# Altium PCB M2male_M2female_miniDP.PcbDoc
Units mm, origin at the board's own origin, x right, y up, seen from the top; angles counter-clockwise.
Board outline 22 x 96.02 mm, 2 copper layers (Top Layer, Bottom Layer); 11 components, 31 nets, 183 pads, 169 vias.
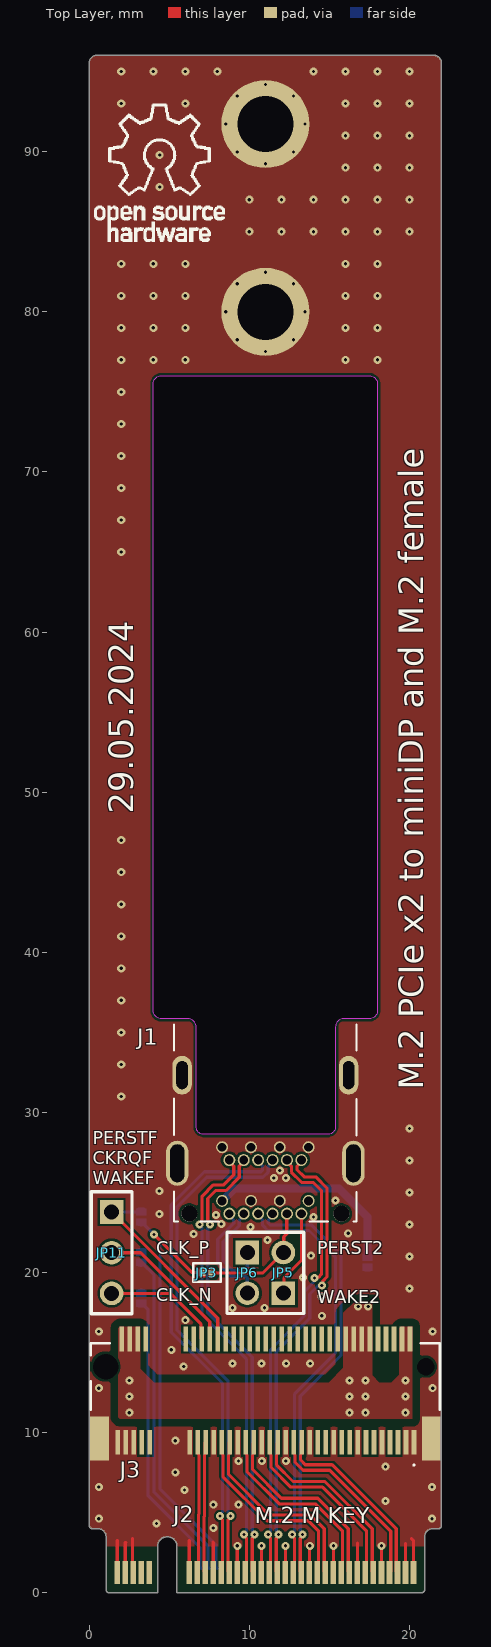
[diagram p0: Top Layer view]
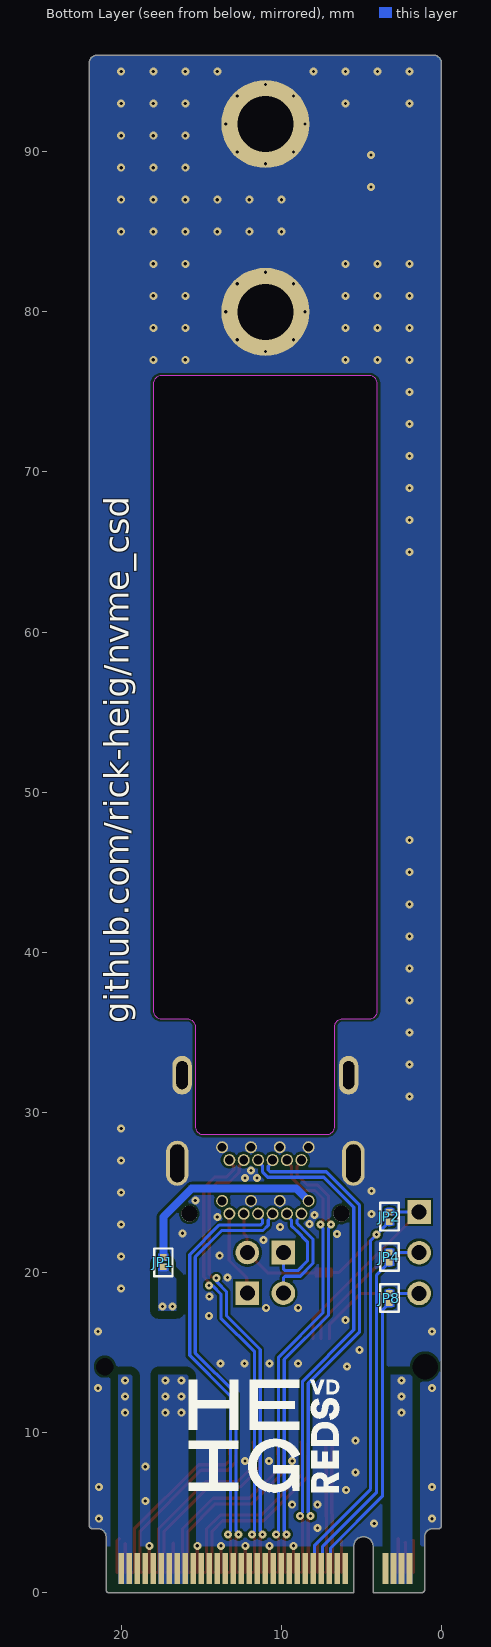
[diagram p1: Bottom Layer view, seen from below]
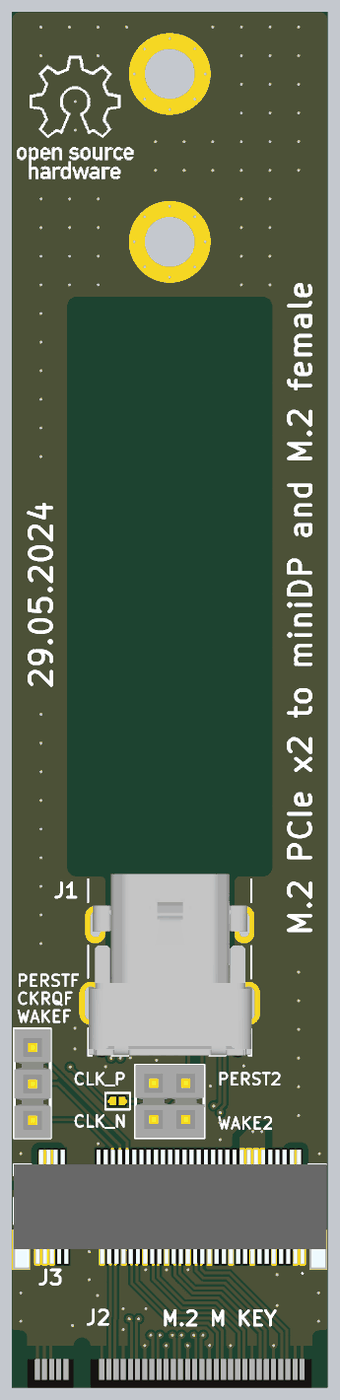
[diagram p2: 3D render of the assembled board from above, using the file's embedded part models]

## Layer stack, top to bottom
Top Solder: solder mask 0.0102, Solder Resist, Dk 3.5
Top Layer: signal copper 0.0356
Dielectric 1: dielectric 0.32, FR-4, Dk 4.8
Bottom Layer: signal copper 0.0356
Bottom Solder: solder mask 0.0102, Solder Resist, Dk 3.5

## Board outline
1.05,0.2 1.05,3.5 ccw(c0.55,3.5) 0.55,4 0.2,4 cw(c0.2,4.2) 0,4.2 0,95.525 cw(c0.5,95.525) 0.5,96.025 21.5,96.025 cw(c21.5,95.525) 22,95.525 22,4.2 cw(c21.8,4.2) 21.8,4 21.45,4 ccw(c21.45,3.5) 20.95,3.5 20.95,0.2 cw(c20.75,0.2) 20.75,0 5.475,0 5.475,2.9 ccw(c4.875,2.9) 4.875,3.5 ccw(c4.875,2.9) 4.275,2.9 4.275,0 1.25,0 cw(c1.25,0.2)
cut-out: 6.675,35.35 ccw(c6.175,35.35) 6.175,35.85 4.5,35.85 cw(c4.5,36.35) 4,36.35 4,75.5 cw(c4.5,75.5) 4.5,76 17.5,76 cw(c17.5,75.5) 18,75.5 18,36.35 cw(c17.5,36.35) 17.5,35.85 15.875,35.85 ccw(c15.875,35.35) 15.375,35.35 15.375,29.125 cw(c14.875,29.125) 14.875,28.625 7.175,28.625 cw(c7.175,29.125) 6.675,29.125

## Design rules (kind name [scope] priority, off if disabled: settings)
BoardOutlineClearance [All] p1: gap=0 ignorepadtopadclearanceinfootprint=FALSE
Clearance Clearance_J2 [All] p1: gap=0.15 ignorepadtopadclearanceinfootprint=FALSE except(0.149: Track-SMDPad SMDPad-SMDPad; 0.5: Poly-Poly)
Clearance [All] p2: gap=0.15 ignorepadtopadclearanceinfootprint=FALSE except(0.5: Poly-Poly)
Clearance Clearance_DIFF [InAnyDifferentialPair] p3: gap=0.15 ignorepadtopadclearanceinfootprint=FALSE
Clearance Clearance_TOP [InNamedPolygon('GND-TOP')] p4: gap=0.15 ignorepadtopadclearanceinfootprint=FALSE
Clearance Clearance_BOTTOM [InNamedPolygon('GND-TOP')] p5: gap=0.15 ignorepadtopadclearanceinfootprint=FALSE
ComponentClearance [All] p1: gap=0.254 collisioncheckmode=3 verticalgap=0.254 showdistances=FALSE donotcheckwithout3dbody=TRUE
DiffPairsRouting [All] p1: maxlimit=0.15 minlimit=0.15 mostfreqgap=0.15 toplayer_minwidth=0.2 toplayer_maxwidth=0.2 toplayer_prefwidth=0.2 bottomlayer_minwidth=0.2 bottomlayer_maxwidth=0.2 bottomlayer_prefwidth=0.2 impedanceprofiledriven=TRUE impedanceprofileid={8BE430F4-6E11-4254-9D0B-8478A02E9357} maxuncoupledlength=12.7
HoleSize [All] p1: absolutevalues=TRUE maxlimit=5 minlimit=0.025 maxpercent=80.000 minpercent=20.000
HoleToHoleClearance [All] p1: gap=0.15 allowstackedmicrovias=TRUE
Length [All] p1: maxlimit=2540 minlimit=0
MatchedLengths MatchLengths_xSignals_J2_J1 [All] p1: tolerance=0.05 checknetsindiffpair=TRUE checkdiffpairvsdiffpair=FALSE checkxsignals=FALSE checkothers=FALSE
MinimumSolderMaskSliver [All] p1: minsoldermaskwidth=0.075
PlaneConnect [All] p1: planeconnectstyle=Direct reliefexpansion=0.508 reliefentries=4 reliefconductorwidth=0.254 reliefairgap=0.254
PolygonConnect PolygonConnect_14 [All vs IsNamedPolygon('3.3V-004')] p1: connectstyle=Direct reliefconductorwidth=0.254 reliefentries=4 polygonreliefangle="90 Angle" airgapwidth=0.254
PolygonConnect PolygonConnect_13 [All vs IsNamedPolygon('GND-BOTTOM')] p2: connectstyle=Direct reliefconductorwidth=0.254 reliefentries=4 polygonreliefangle="90 Angle" airgapwidth=0.254
PolygonConnect PolygonConnect_12 [All vs IsNamedPolygon('GND-TOP')] p3: connectstyle=Direct reliefconductorwidth=0.254 reliefentries=4 polygonreliefangle="90 Angle" airgapwidth=0.254
PolygonConnect PolygonConnect_11 [All vs IsNamedPolygon('3.3V-001')] p4: connectstyle=Direct reliefconductorwidth=0.254 reliefentries=4 polygonreliefangle="90 Angle" airgapwidth=0.254
PolygonConnect PolygonConnect_10 [All vs IsNamedPolygon('3.3V-001')] p5: connectstyle=Direct reliefconductorwidth=0.254 reliefentries=4 polygonreliefangle="90 Angle" airgapwidth=0.254
PolygonConnect PolygonConnect_9 [All vs IsNamedPolygon('3.3V-003')] p6: connectstyle=Direct reliefconductorwidth=0.254 reliefentries=4 polygonreliefangle="90 Angle" airgapwidth=0.254
PolygonConnect PolygonConnect_8 [All vs IsNamedPolygon('3.3V-002')] p7: connectstyle=Direct reliefconductorwidth=0.254 reliefentries=4 polygonreliefangle="90 Angle" airgapwidth=0.254
PolygonConnect PolygonConnect_7 [All vs IsNamedPolygon('3.3V-003')] p8: connectstyle=Direct reliefconductorwidth=0.254 reliefentries=4 polygonreliefangle="90 Angle" airgapwidth=0.254
PolygonConnect PolygonConnect_6 [All vs IsNamedPolygon('GND-TOP')] p9: connectstyle=Direct reliefconductorwidth=0.254 reliefentries=4 polygonreliefangle="90 Angle" airgapwidth=0.254
PolygonConnect PolygonConnect_5 [All vs IsNamedPolygon('Top Layer-GND')] p10: connectstyle=Direct reliefconductorwidth=0.254 reliefentries=4 polygonreliefangle="90 Angle" airgapwidth=0.254
PolygonConnect PolygonConnect_4 [All vs IsNamedPolygon('GND-TOP')] p11: connectstyle=Direct reliefconductorwidth=0.254 reliefentries=4 polygonreliefangle="90 Angle" airgapwidth=0.254
PolygonConnect PolygonConnect_3 [All vs IsNamedPolygon('GND-TOP')] p12: connectstyle=Direct reliefconductorwidth=0.254 reliefentries=4 polygonreliefangle="90 Angle" airgapwidth=0.254
PolygonConnect PolygonConnect_2 [All vs IsNamedPolygon('GND-TOP')] p13: connectstyle=Direct reliefconductorwidth=0.254 reliefentries=4 polygonreliefangle="90 Angle" airgapwidth=0.254
PolygonConnect PolygonConnect_1 [All vs IsNamedPolygon('GND-TOP')] p14: connectstyle=Direct reliefconductorwidth=0.254 reliefentries=4 polygonreliefangle="90 Angle" airgapwidth=0.254
PolygonConnect [All] p15: connectstyle=Relief reliefconductorwidth=0.254 reliefentries=4 polygonreliefangle="90 Angle" airgapwidth=0.254
RoutingVias [All] p1: holewidth=0.2 width=0.5 viastyle="Through Hole" minholewidth=0.15 minwidth=0.4 maxholewidth=0.4 maxwidth=0.8
SilkToSolderMaskClearance [IsPad] p1: minsilkscreentomaskgap=0.2 clearancetoexposedcopper=TRUE
SolderMaskExpansion [All] p1: expansion=0.102 istentingtop=FALSE
SupplyNets "Schematic Supply Nets_1" [InNet('3.3V')] p1: voltage=0.000
SupplyNets "Schematic Supply Nets" [InNet('GND')] p2: voltage=0.000
Width [All] p1: maxlimit=0.5 minlimit=0.1 preferedwidth=0.2
23 further rules are at their usual default settings.

## Classes and differential pairs
differential pair PET3: +PET3_P -PET3_N
differential pair PET2: +PET2_P -PET2_N
differential pair PET1: +PET1_P -PET1_N
differential pair PET0: +PET0_P -PET0_N
differential pair PER3: +PER3_P -PER3_N
differential pair PER2: +PER2_P -PER2_N
differential pair PER1: +PER1_P -PER1_N
differential pair PER0: +PER0_P -PER0_N
differential pair CLK: +CLK_P -CLK_N

## Components (designator, comment, footprint, x,y, rotation, side; value= is the part's Value field where it differs from the comment)
J1 "2129320-3" CONN_2129320-3 11,32.325 r180 top locked
J2 "NGFF_M_V2" M.2-M-KEY-2280-V2 11,0 r0 top locked value=NGFF_M
J3 "APCI0164-P001A" APCI0164P001A 11.026,12.625 r180 top locked
JP1 "JUMPER_A_SOUDER" "JUMPER_A_SOUDER (0201)" 17.375,20.65 r270 bottom value=0201
JP2 "JUMPER_A_SOUDER" "JUMPER_A_SOUDER (0201)" 3.25,23.475 r90 bottom value=0201
JP3 "JUMPER_A_SOUDER" "JUMPER_A_SOUDER (0201)" 7.35,20 r0 top value=0201
JP4 "JUMPER_A_SOUDER" "JUMPER_A_SOUDER (0201)" 3.25,20.95 r90 bottom value=0201
JP5 "HEADER_2" BLKCON.100/VH/TM1SQ/W.100/2 12.125,19.98 r90 top
JP6 "HEADER_2" BLKCON.100/VH/TM1SQ/W.100/2 9.875,19.98 r270 top
JP8 "JUMPER_A_SOUDER" "JUMPER_A_SOUDER (0201)" 3.25,18.4 r90 bottom value=0201
JP11 "HEADER_3" BLKCON.100/VH/TM1SQ/W.100/3 1.397,21.24 r270 top

## Footprints (in the part's own frame and the unit in brackets; to place one, negate y for a bottom-side part, rotate by r counter-clockwise, add the part's x,y. Pads: shape width x height; smd on the part's side, far side on the other; paste and mask are expansions set on the pad)
APCI0164P001A [mm]
  rect 0.3x1.55 smd: 1(-9.25,3.225) 2(-9,-3.225) 3(-8.75,3.225) 4(-8.5,-3.225) 5(-8.25,3.225) 6(-8,-3.225) 7(-7.75,3.225) 8(-7.5,-3.225) 9(-7.25,3.225) 10(-7,-3.225) 11(-6.75,3.225) 12(-6.5,-3.225) 13(-6.25,3.225) 14(-6,-3.225) 15(-5.75,3.225) 16(-5.5,-3.225) 17(-5.25,3.225) 18(-5,-3.225) 19(-4.75,3.225) 20(-4.5,-3.225) 21(-4.25,3.225) 22(-4,-3.225) 23(-3.75,3.225) 24(-3.5,-3.225) 25(-3.25,3.225) 26(-3,-3.225) 27(-2.75,3.225) 28(-2.5,-3.225) 29(-2.25,3.225) 30(-2,-3.225) 31(-1.75,3.225) 32(-1.5,-3.225) 33(-1.25,3.225) 34(-1,-3.225) 35(-0.75,3.225) 36(-0.5,-3.225) 37(-0.25,3.225) 38(0,-3.225) 39(0.25,3.225) 40(0.5,-3.225) 41(0.75,3.225) 42(1,-3.225) 43(1.25,3.225) 44(1.5,-3.225) 45(1.75,3.225) 46(2,-3.225) 47(2.25,3.225) 48(2.5,-3.225) 49(2.75,3.225) 50(3,-3.225) 51(3.25,3.225) 52(3.5,-3.225) 53(3.75,3.225) 54(4,-3.225) 55(4.25,3.225) 56(4.5,-3.225) 57(4.75,3.225) 58(5,-3.225) 67(7.25,3.225) 68(7.5,-3.225) 69(7.75,3.225) 70(8,-3.225) 71(8.25,3.225) 72(8.5,-3.225) 73(8.75,3.225) 74(9,-3.225) 75(9.25,3.225)
  round 0.55 hole 1.1 unplated: MH1(-10,-1.5)
  round 0.8 hole 1.6 unplated: MH2(10,-1.5)
  rect 1.2x2.75 smd mask+0.024: MP1(-10.35,3) MP2(10.402,3)
  silkscreen extent -10.87,-2.95 10.92,4.7, body extent -10.92,-3.97 10.92,4.26, height 8.8
BLKCON.100/VH/TM1SQ/W.100/2 [mil] "Barette 2.54 - 2P"
  rect 58x58 hole 37: 1(-50,0)
  round 58 hole 37: 2(50,0)
  silkscreen extent -100,-50 100,50, body extent -100,-50 100,50, height 330
BLKCON.100/VH/TM1SQ/W.100/3 [mil] "Barette 2.54 - 3P"
  rect 58x58 hole 37: 1(-100,0)
  round 58 hole 37: 2(0,0) 3(100,0)
  silkscreen extent -150,-50 150,50, body extent -148,-49 152,51, height 330
CONN_2129320-3 [mm]
  round 0.75 hole 0.55: 1G(-2.7,4.5) 2(-2.7,7.85) 3(-2.25,5.3) 4(-2.25,8.65) 5(-1.35,5.3) 6(-1.35,8.65) 7G(-0.9,4.5) 8G(-0.9,7.85) 9(-0.45,5.3) 10(-0.45,8.65) 11(0.45,5.3) 12(0.45,8.65) 13G(0.9,4.5) 14G(0.9,7.85) 15(1.35,5.3) 16(1.35,8.65) 17(2.25,5.3) 18(2.25,8.65) 19G(2.7,4.5) 20_POWER(2.7,7.85)
  oval 1.408x2.816 hole 0.9 slot 2.35 at 90 deg: 21(-5.5,5.5) 22(5.5,5.5)
  oval 1.208x2.416 hole 0.7 slot 1.74 at 90 deg: 23(5.2,0) 24(-5.2,0)
  round 1 hole 1 unplated: ""(-4.75,8.65) ""(4.75,8.65)
  silkscreen extent -5.7,-3.18 5.7,9.15, body extent -5.72,-3.52 5.68,9.13, height 4.21
"JUMPER_A_SOUDER (0201)" [mm]
  rect 0.4x0.4 smd paste-10: 1(-0.3,0) 2(0.3,0)
  Top Layer region: -0.1,0.3 -0.1,-0.3 -0.525,-0.3 -0.584,0 -0.525,0.3 -0.525,0.3
  Top Layer region: 0.1,-0.3 0.1,0.3 0.525,0.3 0.584,0 0.525,-0.3 0.525,-0.3
  silkscreen extent -0.85,-0.58 0.87,0.58
M.2-M-KEY-2280-V2 [mm] "M.2-KEY-M"
  rect 0.35x1.45 smd mask+0: 1(9.25,1.275) 3(8.75,1.275) 5(8.25,1.275) 7(7.75,1.275) 9(7.25,1.275) 11(6.75,1.275) 13(6.25,1.275) 15(5.75,1.275) 17(5.25,1.275) 19(4.75,1.275) 21(4.25,1.275) 23(3.75,1.275) 25(3.25,1.275) 27(2.75,1.275) 29(2.25,1.275) 31(1.75,1.275) 33(1.25,1.275) 35(0.75,1.275) 37(0.25,1.275) 39(-0.25,1.275) 41(-0.75,1.275) 43(-1.25,1.275) 45(-1.75,1.275) 47(-2.25,1.275) 49(-2.75,1.275) 51(-3.25,1.275) 53(-3.75,1.275) 55(-4.25,1.275) 57(-4.75,1.275) 67(-7.25,1.275) 69(-7.75,1.275) 71(-8.25,1.275) 73(-8.75,1.275) 75(-9.25,1.275)
  rect 0.35x1.95 smd far side mask+0: 2(9,1.525) 4(8.5,1.525) 6(8,1.525) 8(7.5,1.525) 10(7,1.525) 12(6.5,1.525) 14(6,1.525) 16(5.5,1.525) 18(5,1.525) 20(4.5,1.525) 22(4,1.525) 24(3.5,1.525) 26(3,1.525) 28(2.5,1.525) 30(2,1.525) 32(1.5,1.525) 34(1,1.525) 36(0.5,1.525) 38(0,1.525) 40(-0.5,1.525) 42(-1,1.525) 44(-1.5,1.525) 46(-2,1.525) 48(-2.5,1.525) 50(-3,1.525) 52(-3.5,1.525) 54(-4,1.525) 56(-4.5,1.525) 58(-5,1.525) 68(-7.5,1.525) 70(-8,1.525) 72(-8.5,1.525) 74(-9,1.525)

## Part data
J1: "Conn Display Port RCP 20 POS 0.9mm/1.8mm Solder RA Thru-Hole 20 Terminal 1 Port T/R", Package=None, Centerline_Pitch=".6 mm[.02 in]", Digi-Key_Part_Number=A120537CT-ND, Digi-Key_Purchase_URL=https://www.digikey.com/product-detail/en/te-connectivity-amp-connectors/2129320-3/A120537CT-ND/5021748?utm_source=snapeda&utm_medium=aggregator&utm_campaign=symbol, EU_RoHS_Compliance=Compliant, MF="TE Connectivity", MP=2129320-3, Number_of_Positions=20, Product_Type=Connector, SnapEDA_Link=https://www.snapeda.com/parts/2129320-3/TE%20Connectivity%20AMP%20Connectors/view-part/1192429/?ref=snap, TE_purchase_URL=https://www.te.com/usa-en/product-2129320-3.html?te_bu=Cor&te_type=disp&te_campaign=seda_glo_cor-seda-global-disp-prtnr-fy19-seda-model-bom-cta_sma-317_1&elqCampaignId=32493
J3: "Connector", Manufacturer_Name=LOTES, Datasheet Link=https://datasheet.lcsc.com/lcsc/2012071238_LOTES-APCI0164-P001A_C841666.pdf, Height=8.7mm, Manufacturer_Part_Number=APCI0164-P001A
JP1 JP2 JP3 JP4 JP8: library part 683, "Pont à souder sur print", Component=Connector, Component Type Category Connector Type="Jumper à souder", ID=683, RoHS Compliant=False
JP5 JP6: library part 358, "Barrette simple 2 poles 2.54mm", Manufacturer="TE Connectivity", Manufacturer P/N=5-826629-0, Supplier Part Number 1=122354, Component=Connector, Component Type Category Connector Type="Barrette 2.54mm", ComponentLink1Description=Datasheet, ComponentLink1URL=https://www.distrelec.ch/ishop/Datasheets/eh826629_draw.pdf, ComponentLink2Description=Supplier, ComponentLink2URL=https://www.distrelec.ch/barrette-%C3%A0-broches-50-p%C3%B4les-1p-x50/te-connectivity/5-826629-0/122354/fr, ID=358, RoHS Compliant=True, Supplier 1=Distrelec
JP11: library part 359, "Barrette simple 3 poles 2.54mm", Manufacturer="TE Connectivity", Manufacturer P/N=5-826629-0, Supplier Part Number 1=122354, Component=Connector, Component Type Category Connector Type="Barrette 2.54mm", ComponentLink1Description=Datasheet, ComponentLink1URL=#https://www.distrelec.ch/ishop/Datasheets/eh826629_draw.pdf#, ComponentLink2Description=Supplier, ComponentLink2URL=https://www.distrelec.ch/barrette-%C3%A0-broches-50-p%C3%B4les-1p-x50/te-connectivity/5-826629-0/122354/fr, ID=359, RoHS Compliant=False, Supplier 1=Distrelec

## Free pads (board coordinates)
  round 5.5 hole 3.5: 2(11,80) 2(11,91.725)

## Via types
v1: diameter 0.5, hole 0.2, Top Layer to Bottom Layer, tented both sides, 169 vias

## Nets (pads, with @x,y where several pads share a name; then routed paths per layer and width w, separated by ;. In a path a pad name is that pad's centre, name@x,y a point inside that pad or via, vN(x,y) a via of type N, cw(c..) or ccw(c..) an arc to the next point about the centre after c; other vN are vias at no path point)
3.3V: J2.2 J2.4 J2.12 J2.14 J2.16 J2.18 J2.70 J2.72 J2.74 J3.2 J3.4 J3.12 J3.14 J3.16 J3.18 J3.70 J3.72 J3.74 JP1.2
  other v1: 2.5,11.25 16.25,11.25 17.25,11.25 19.75,11.25 2.5,12.25 16.25,12.25 17.25,12.25 19.75,12.25 2.5,13.25 16.25,13.25 17.25,13.25 19.75,13.25 16.8,17.875 17.425,17.875
CLK2_N: J1.18 JP6.2 | length 6.8
  Bottom Layer w0.2: J1.18 8.75,23.558 9.025,23.283 9.025,23.066 8.908,22.949 8.899,22.949 8.025,22.075 8.025,20.575 8.825,19.775 9.758,19.775 9.875,19.658 JP6.2@9.875,18.68
CLK2_P: J1.16 JP6.1 | length 6.3
  Bottom Layer w0.2: J1.16 9.65,23.558 9.375,23.283 9.375,22.921 9.053,22.599 9.044,22.599 8.375,21.93 8.375,20.72 8.97,20.125 9.758,20.125 9.875,20.242 JP6.1@9.875,21.22
CLK_N: J2.53 J3.53 | length 8.2
  Top Layer w0.2: J2.53 7.175,1.35 7.175,2.104 7.175,4.744 7.201,4.769 7.201,8.608 7.226,8.633 7.226,9.35 J3.53
CLK_P: J2.55 J3.55 | length 8.2
  Top Layer w0.2: J2.55 6.825,1.35 6.825,2.104 6.825,4.889 6.851,4.914 6.851,8.608 6.826,8.633 6.826,9.35 J3.55
CLKREQ: J2.52 JP4.1 | length 20.9
  Bottom Layer w0.2: JP4.1 4.05,19.85 4.05,6.275 7.425,2.9 7.425,1.6 J2.52
CLKREQ_F: J3.52 JP4.2 JP11.2 | length 10.8
  Top Layer w0.2: JP11.2 3.21,21.24 7.526,16.924 J3.52
  Bottom Layer w0.2: JP11.2 1.402,21.245 3.245,21.245 JP4.2
GND: J1.1G J1.7G J1.8G J1.13G J1.14G J1.19G J1.21 J1.22 J1.23 J1.24 J2.1 J2.3 J2.9 J2.15 J2.21 J2.27 J2.33 J2.39 J2.45 J2.51 J2.57 J2.71 J2.73 J2.75 J3.1 J3.3 J3.9 J3.15 J3.21 J3.27 J3.33 J3.39 J3.45 J3.51 J3.57 J3.71 J3.73 J3.75 J3.MP1 J3.MP2 pad.2 | length 25.5
  Top Layer w0.2: J2.75 1.75,3.25 1.775,3.275 ; J2.73 2.25,3.125 2.275,3.15 ; 2.7,3.375 2.7,1.325 J2.71 ; J2.57 6.25,3.275 ; 7.725,3.175 7.75,3.15 J2.51 ; J2.45 v1@9.25,2.883 ; J2.39 v1@10.75,2.883 ; J2.33 v1@12.25,2.883 ; J2.27 13.763,1.288 13.763,2.874 v1@13.776,2.887 ; J2.21 15.25,2.883 15.25,2.8 v1@15.275,2.775 ; J2.15 16.75,3.102 ; J2.9 v1@18.25,2.883 ; J2.3 19.75,3.075 ; 20.125,3.375 20.25,3.25 J2.1
  other v1: 9.25,2.933 10.75,2.933 12.25,2.933 15.25,2.933 18.25,2.933 13.776,2.937 7.75,4.05 4.2,4.325 0.6,4.625 21.4,4.625 7.75,5.5 9.325,5.5 18.5,5.725 5.95,6.425 0.6,6.6 21.4,6.6 5.375,7.525 18.5,7.875 9.325,8.225 10.775,8.225 12.275,8.225 5.375,9.5 0.6,12.775 21.451,12.775 5.9,14.125 8.95,14.325 10.75,14.325 12.3,14.325 13.8,14.325 5.125,15.175 0.6,16.325 21.451,16.325 6,17.025 14.525,17.3 8.95,17.8 10.95,17.8 14.5,18.5 20,19 13.365,19.685 20,21 13.85,21.05 11.125,22.025 6.525,22.4 16.175,22.45 10.075,22.85 8.25,23.025 20,23 14,23.475 7.925,23.6 4.375,23.65 15.375,24.5 20,25 4.375,25.1 11.525,25.9 12.275,25.9 11.9,26.375 20,27 20,29 2,31 2,33 2,35 2,37 2,39 2,41 2,43 2,45 2,47 2,65 2,67 2,69 2,71 2,73 2,75 2,77 4,77 6,77 16,77 18,77 11,77.525 9.25,78.25 12.75,78.25 2,79 4,79 6,79 16,79 18,79 8.525,80 13.475,80 2,81 4,81 6,81 16,81 18,81 9.25,81.75 12.75,81.75 11,82.475 2,83 4,83 6,83 16,83 18,83 10,85 12,85 14,85 16,85 18,85 20,85 10,87 12,87 14,87 16,87 18,87 20,87 4.4,87.8 16,89 18,89 20,89 11,89.25 4.4,89.8 9.25,89.975 12.75,89.975 16,91 18,91 20,91 8.525,91.725 13.475,91.725 2,93 6,93 16,93 18,93 20,93 9.25,93.475 12.75,93.475 11,94.2 2,95 4,95 6,95 8,95 14,95 16,95 18,95 20,95
NetJ1_20_POWER: J1.20_POWER JP1.1 | length 12.5
  Bottom Layer w0.5: J1.20_POWER@8.32,24.495 9.075,25.25 15.6,25.25 17.375,23.475 JP1.1@17.375,21.031
PER0_N: J1.15 J2.41 | length 28.2
  Top Layer w0.2: v1(7.55,23) 7.55,23.081 7.4,23.231 7.4,24.625 7.9,25.125 8.545,25.125 9.375,25.955 9.375,26.633 9.65,26.908 J1.15 ; 10.175,3.419 10.175,2.571 10.175,2.017 10.175,1.35 J2.41@10.25,1.275
  Bottom Layer w0.2: v1(7.55,23) 7.55,22.919 7.4,22.769 7.4,20.319 7.4,17.495 10.175,14.72 10.175,3.881 10.325,3.731 v1(10.325,3.65)
PER0_P: J1.17 J2.43 | length 28.2
  Top Layer w0.2: v1(6.9,23) 6.9,23.081 7.05,23.231 7.05,24.77 7.755,25.475 8.4,25.475 9.025,26.1 9.025,26.633 8.75,26.908 J1.17 ; J2.43 9.825,1.35 9.825,2.017 9.825,2.716 9.825,3.419
  Bottom Layer w0.2: v1(6.9,23) 6.9,22.919 7.05,22.769 7.05,20.174 7.05,17.35 9.825,14.575 9.825,3.881 9.675,3.731 v1(9.675,3.65)
PER1_N: J1.10 J2.29 | length 26.8
  Top Layer w0.2: 13.175,3.419 13.175,2.571 13.175,2.017 13.175,1.35 J2.29
  Bottom Layer w0.2: J1.10 11.45,23.558 11.175,23.283 11.175,23.092 11.292,22.975 12.466,22.975 13.87,22.975 15.725,21.12 15.725,14.825 13.178,12.278 13.178,8.228 13.175,8.226 13.175,3.881 13.325,3.731 v1(13.325,3.65)
PER1_P: J1.12 J2.31 | length 26.8
  Top Layer w0.2: J2.31 12.825,1.35 12.825,2.017 ; 12.825,2.017 12.825,2.716 12.825,3.419
  Bottom Layer w0.2: J1.12 10.55,23.558 10.825,23.283 10.825,22.947 11.147,22.625 12.611,22.625 13.725,22.625 15.375,20.975 15.375,14.97 12.828,12.422 12.828,8.373 12.825,8.371 12.825,3.881 12.675,3.731 v1(12.675,3.65)
PER2_N: J2.17 J3.41 | length 12
  Top Layer w0.2: J3.41 10.226,9.35 10.226,8.633 10.201,8.608 10.201,7.699 12,5.9 14.27,5.9 16.175,3.995 16.175,2.878 16.175,2.104 16.175,1.35 J2.17
PER2_P: J2.19 J3.43 | length 12
  Top Layer w0.2: J3.43 9.826,9.35 9.826,8.633 9.851,8.608 9.851,8.154 9.851,7.554 11.855,5.55 14.125,5.55 15.825,3.85 15.825,3.023 15.825,2.104 15.825,1.35 J2.19
PER3_N: J2.5 J3.29 | length 11.6
  Top Layer w0.2: J3.29 13.226,9.35 13.226,8.633 13.201,8.608 13.201,8.294 13.495,8 15.17,8 19.175,3.995 19.175,2.104 19.175,1.35 J2.5
PER3_P: J2.7 J3.31 | length 11.6
  Top Layer w0.2: J3.31 12.826,9.35 12.826,8.633 12.851,8.608 12.851,8.149 13.35,7.65 15.025,7.65 18.825,3.85 18.825,2.104 18.825,1.35 J2.7
PERST: J2.50 JP2.1 JP3.1 | length 27.6
  Top Layer w0.2: v1@4.063,22.363 6.425,20 JP3.1
  Bottom Layer w0.2: JP2.1 4.425,22 4.425,6.475 7.925,2.975 7.925,1.6 J2.50
  other v1: 4.05,22.375
PERST2: J1.6 JP3.2 JP5.2 | length 7.4
  Top Layer w0.2: JP3.2@7.75,19.975 10.85,19.975 JP5.2 ; JP5.2@12.15,21.25 12.15,22.225 12.337,22.412 12.337,23.662 J1.6
PERST_F: J3.50 JP2.2 JP11.1 | length 12.5
  Top Layer w0.2: JP11.1 8.026,17.151 J3.50
  Bottom Layer w0.2: JP11.1 1.402,23.775 JP2.2
PET0_N: J1.9 J2.47 | length 31.5
  Top Layer w0.2: J2.47 8.675,1.35 8.675,2.017 8.675,2.453 8.675,4.181 8.675,4.569 8.825,4.719 v1(8.825,4.8)
  Bottom Layer w0.2: 8.675,5.031 8.675,13.22 5.475,16.42 5.475,24.08 7.345,25.95 8.984,25.95 10.853,25.95 11.175,26.272 11.175,26.633 11.45,26.908 J1.9
PET0_P: J1.11 J2.49 | length 31.5
  Top Layer w0.2: v1(8.175,4.8) 8.175,4.719 8.325,4.569 8.325,4.036 8.325,2.598 8.325,2.017 8.325,1.35 J2.49
  Bottom Layer w0.2: 8.325,5.031 8.325,13.075 5.125,16.275 5.125,24.225 7.2,26.3 9.129,26.3 10.708,26.3 10.825,26.417 10.825,26.633 10.55,26.908 J1.11
PET1_N: J1.3 J2.35 | length 28.1
  Top Layer w0.2: 11.675,3.419 11.675,2.571 11.675,2.017 11.675,1.35 J2.35 ; J1.3 13.25,26.908 12.975,26.633 12.975,26.416 13.416,25.975 14.145,25.975 14.85,25.27 14.85,19.737 14.582,19.47
  Bottom Layer w0.2: v1(11.825,3.65) 11.825,3.731 11.675,3.881 11.675,15.05 13.775,17.15 13.775,18.662 14.255,19.143 14.468,19.143 v1(14.525,19.2)
PET1_P: J1.5 J2.37 | length 28.1
  Top Layer w0.2: J2.37 11.325,1.35 11.325,2.017 11.325,2.716 11.325,3.419 ; J1.5 12.35,26.908 12.625,26.633 12.625,26.271 13.271,25.625 14,25.625 14.5,25.125 14.5,19.882 14.335,19.717
  Bottom Layer w0.2: v1(11.175,3.65) 11.175,3.731 11.325,3.881 11.325,15.195 13.425,17.295 13.425,18.807 14.008,19.39 14.008,19.602 v1(14.065,19.66)
PET2_N: J2.23 J3.47 | length 12.2
  Top Layer w0.2: J3.47 8.726,9.35 8.726,8.633 8.701,8.608 8.701,7.399 11.25,4.85 13.82,4.85 14.675,3.995 14.675,2.571 14.675,2.017 14.675,1.35 J2.23
PET2_P: J2.25 J3.49 | length 12.2
  Top Layer w0.2: J3.49 8.326,9.35 8.326,8.633 8.351,8.608 8.351,8.154 8.351,7.254 11.105,4.5 13.675,4.5 14.325,3.85 14.325,2.716 14.325,2.017 ; J2.25 14.325,1.35 14.325,2.017
PET3_N: J2.11 J3.35 | length 11.8
  Top Layer w0.2: J3.35 11.726,9.35 11.726,8.633 11.701,8.608 11.701,7.974 12.725,6.95 14.72,6.95 17.675,3.995 17.675,2.776 17.675,2.017 17.675,1.35 J2.11
PET3_P: J2.13 J3.37 | length 11.8
  Top Layer w0.2: J3.37 11.326,9.35 11.326,8.633 11.351,8.608 11.351,8.154 11.351,7.829 12.58,6.6 14.575,6.6 17.325,3.85 17.325,2.921 17.325,2.017 17.325,1.35 J2.13
PEWAKE: J2.54 JP8.1 | length 18.1
  Bottom Layer w0.2: JP8.1 3.675,17.675 3.675,6.05 6.925,2.8 6.925,1.6 J2.54
PEWAKE2: J1.4 JP5.1 | length 5.5
  Top Layer w0.2: JP5.1@12.125,18.68 12.163,18.718 12.163,19.663 13.25,20.75 J1.4
PEWAKE_F: J3.54 JP8.2 JP11.3 | length 9.2
  Top Layer w0.2: JP11.3 5.05,18.7 6.988,16.762 6.988,15.887 J3.54
  Bottom Layer w0.2: JP11.3 JP8.2
pads on no net: J1. J1.2 J2.6 J2.8 J2.10 J2.20 J2.22 J2.24 J2.26 J2.28 J2.30 J2.32 J2.34 J2.36 J2.38 J2.40 J2.42 J2.44 J2.46 J2.48 J2.56 J2.58 J2.67 J2.68 J2.69 J3.5 J3.6 J3.7 J3.8 J3.10 J3.11 J3.13 J3.17 J3.19 J3.20 J3.22 J3.23 J3.24 J3.25 J3.26 J3.28 J3.30 J3.32 J3.34 J3.36 J3.38 J3.40 J3.42 J3.44 J3.46 J3.48 J3.56 J3.58 J3.67 J3.68 J3.69 J3.MH1 J3.MH2

## Polygon pours and split planes (outlines as drawn)
no net on Top Solder "GND-001" (solid): 8.15,80 cw(c11,80) 13.85,80 12.75,80 ccw(c11,80) 9.25,80
GND on Bottom Layer "GND-BOTTOM" (solid, pour order 23): 1.05,2.9 1.05,3.5 ccw(c0.55,3.5) 0.55,4 0.2,4 cw(c0.2,4.2) 0,4.2 0,95.525 cw(c0.5,95.525) 0.5,96.025 21.5,96.025 cw(c21.5,95.525) 22,95.525 22,4.2 cw(c21.8,4.2) 21.8,4 21.45,4 ccw(c21.45,3.5) 20.95,3.5 20.95,2.9 5.475,2.9 ccw(c4.875,2.9) 4.875,3.5 ccw(c4.875,2.9) 4.275,2.9
3.3V on Bottom Layer "3.3V-004" (solid, pour order 20): 17.675,20.55 17.675,17.625 16.55,17.625 16.55,19.625 17.075,20.15 17.075,20.55
3.3V on Bottom Layer "3.3V-002" (solid, pour order 9): 15.825,0.55 17.675,0.55 17.675,13.625 15.825,13.625
3.3V on Bottom Layer "3.3V-003" (solid, pour order 10): 1.825,0.55 3.175,0.55 3.175,13.625 1.824,13.625
3.3V on Bottom Layer "3.3V-001" (solid, pour order 8): 19.325,0.55 20.175,0.55 20.175,13.625 19.325,13.625 19.325,2.05
GND on Top Layer "GND-TOP" (solid, pour order 21): 1.05,2.9 1.05,3.5 ccw(c0.55,3.5) 0.55,4 0.2,4 cw(c0.2,4.2) 0,4.2 0,95.525 cw(c0.5,95.525) 0.5,96.025 21.5,96.025 cw(c21.5,95.525) 22,95.525 22,4.2 cw(c21.8,4.2) 21.8,4 21.45,4 ccw(c21.45,3.5) 20.95,3.5 20.95,2.9 5.475,2.9 ccw(c4.875,2.9) 4.875,3.5 ccw(c4.875,2.9) 4.275,2.9
3.3V on Top Layer "3.3V-001" (solid, pour order 19): 1.825,10.875 20.175,10.875 20.175,13.125 20.175,16.625 19.376,16.625 19.376,13.626 18.875,13.125 18.125,13.125 17.675,13.575 17.675,18.15 16.554,18.15 15.873,17.476 15.876,14.051 14.95,13.125 4.05,13.125 3.175,14 3.175,16.625 1.825,16.625 1.825,13.125
no net on Bottom Solder "GND-001" (solid): 8.15,80 cw(c11,80) 13.85,80 12.75,80 ccw(c11,80) 9.25,80

## Silkscreen, mask and mechanical layers (free items; w line width, h text height)
Top Overlay:
  drawing of 18 lines, arcs and shapes, not listed
  text "29.05.2024" at 2.746,48.654 h1.52 r90
  text "M.2 PCIe x2 to miniDP and M.2 female" at 20.846,31.404 h1.52 r90
  text "PERSTF" at 0.225,28.025 h0.8
  text "CKRQF" at 0.225,26.775 h0.8
  text "WAKEF" at 0.225,25.525 h0.8
  text "CLK_P" at 4.175,21.158 h0.8
  text "PERST2" at 14.25,21.158 h0.8
  text "CLK_N" at 4.175,18.208 h0.8
  text "WAKE2" at 14.25,18.075 h0.8
  text "M.2 M KEY" at 10.325,4.35 h1
Bottom Overlay:
  drawing of 10 lines, arcs and shapes, not listed
  text "github.com/rick-heig/nvme_csd" at 19.537,35.579 h1.52 r270
Mechanical 1:
  lines w0.2: 6.175,35.85 cw(c6.175,35.35) 6.675,35.35 6.675,29.125 ; 6.175,35.85 6.175,35.85 ; 6.175,35.85 4.5,35.85 cw(c4.5,36.35) 4,36.35 4,75.5 cw(c4.5,75.5) 4.5,76 17.5,76 cw(c17.5,75.5) 18,75.5 18,36.35 cw(c17.5,36.35) 17.5,35.85 17.5,35.85 15.875,35.85 ccw(c15.875,35.35) 15.375,35.35 ; 6.675,29.125 ccw(c7.175,29.125) 7.175,28.625 14.875,28.625 ; 6.675,29.125 6.675,29.125 ; 14.875,28.625 ccw(c14.875,29.125) 15.375,29.125 15.375,35.35 ; 14.875,28.625 14.875,28.625 ; 15.375,35.35 15.375,35.35 ; 0,4.2 ccw(c0.2,4.2) 0.2,4 0.55,4 cw(c0.55,3.5) 1.05,3.5 1.05,0.2 ccw(c1.25,0.2) 1.25,0 4.275,0 4.275,2.9 cw(c4.875,2.9) 4.875,3.5 cw(c4.875,2.9) 5.475,2.9 5.475,0 20.75,0 ccw(c20.75,0.2) 20.95,0.2 20.95,3.5 cw(c21.45,3.5) 21.45,4 21.8,4 ccw(c21.8,4.2) 22,4.2 22,95.525 ccw(c21.5,95.525) 21.5,96.025 0.5,96.025 ccw(c0.5,95.525) 0,95.525 0,4.2

## Text inside footprints (layer, text, board x,y; h text height)
JP5: Mechanical 13 "1" at 12.633,16.678 h0.95 r90
JP6: Mechanical 13 "1" at 9.367,23.282 h0.95 r270